# Altium PCB STC.PcbDoc
Units mil, origin at the board's own origin, x right, y up, seen from the top; angles counter-clockwise.
Board outline 6000 x 4000 mil, 2 copper layers (Top Layer, Bottom Layer); 22 components, 0 nets, 580 pads, 4 vias.
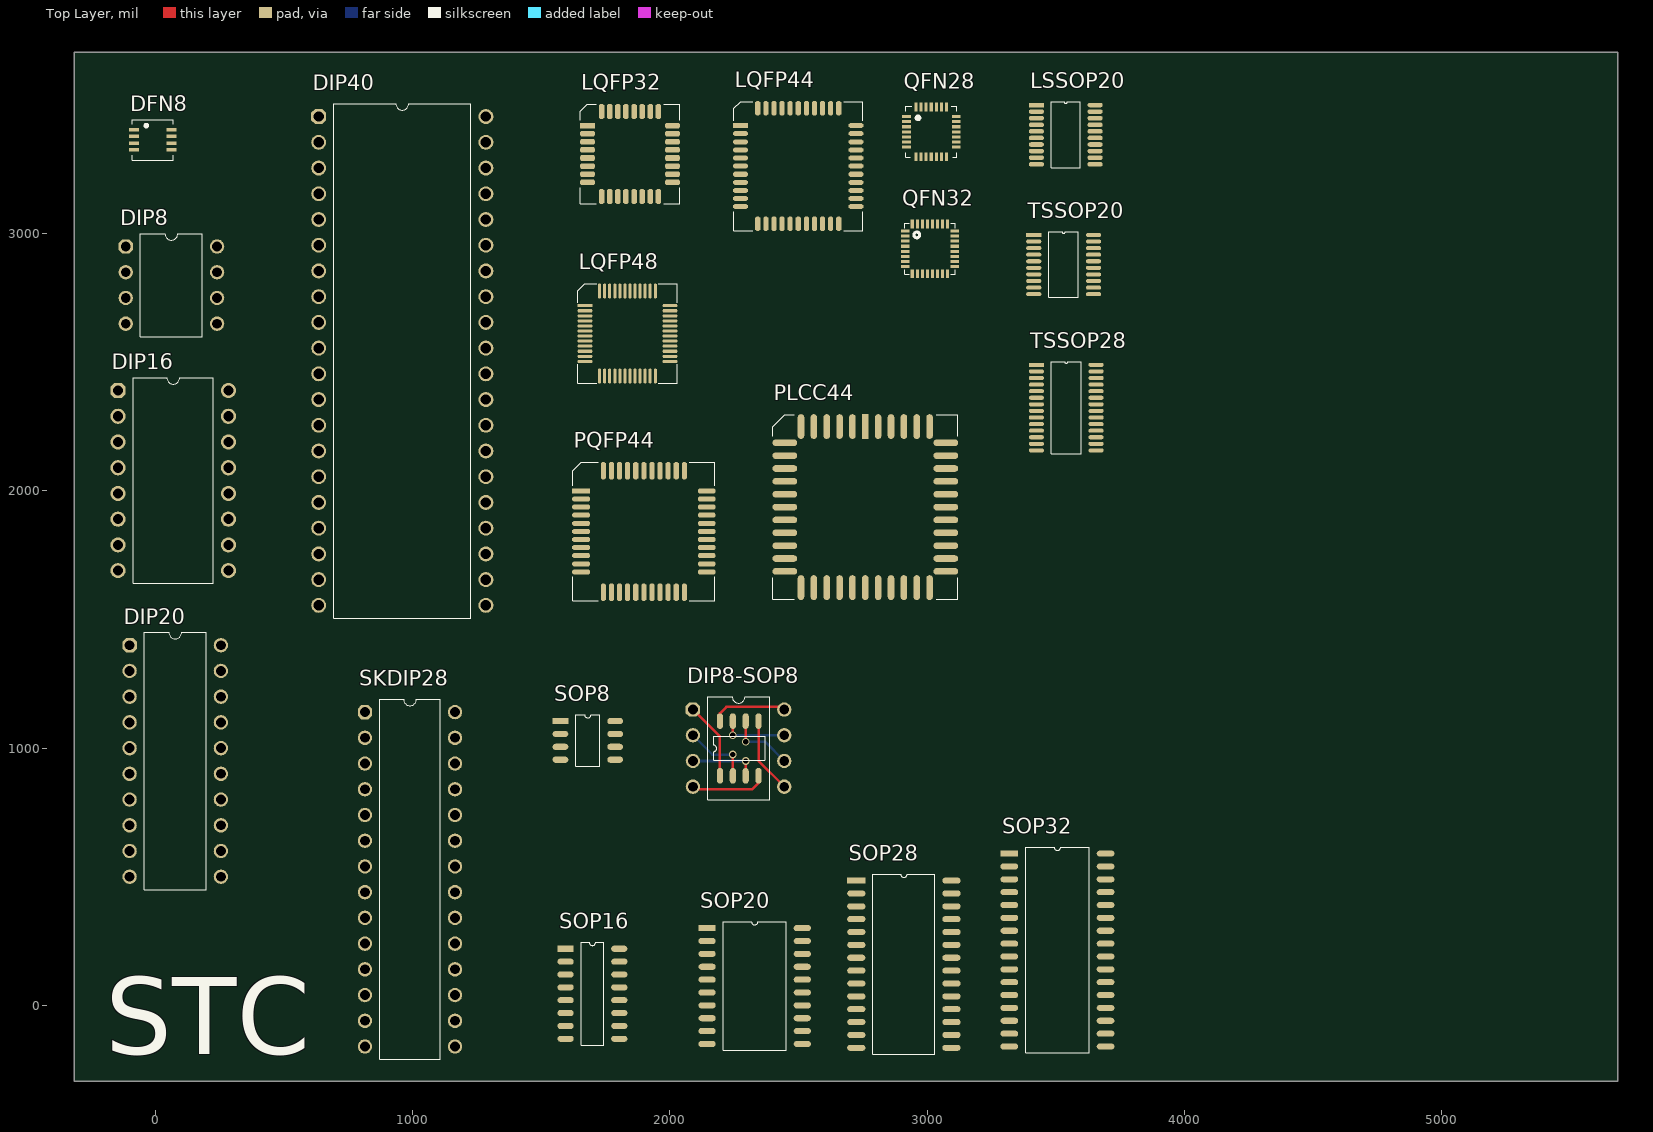
[diagram p0: Top Layer view]
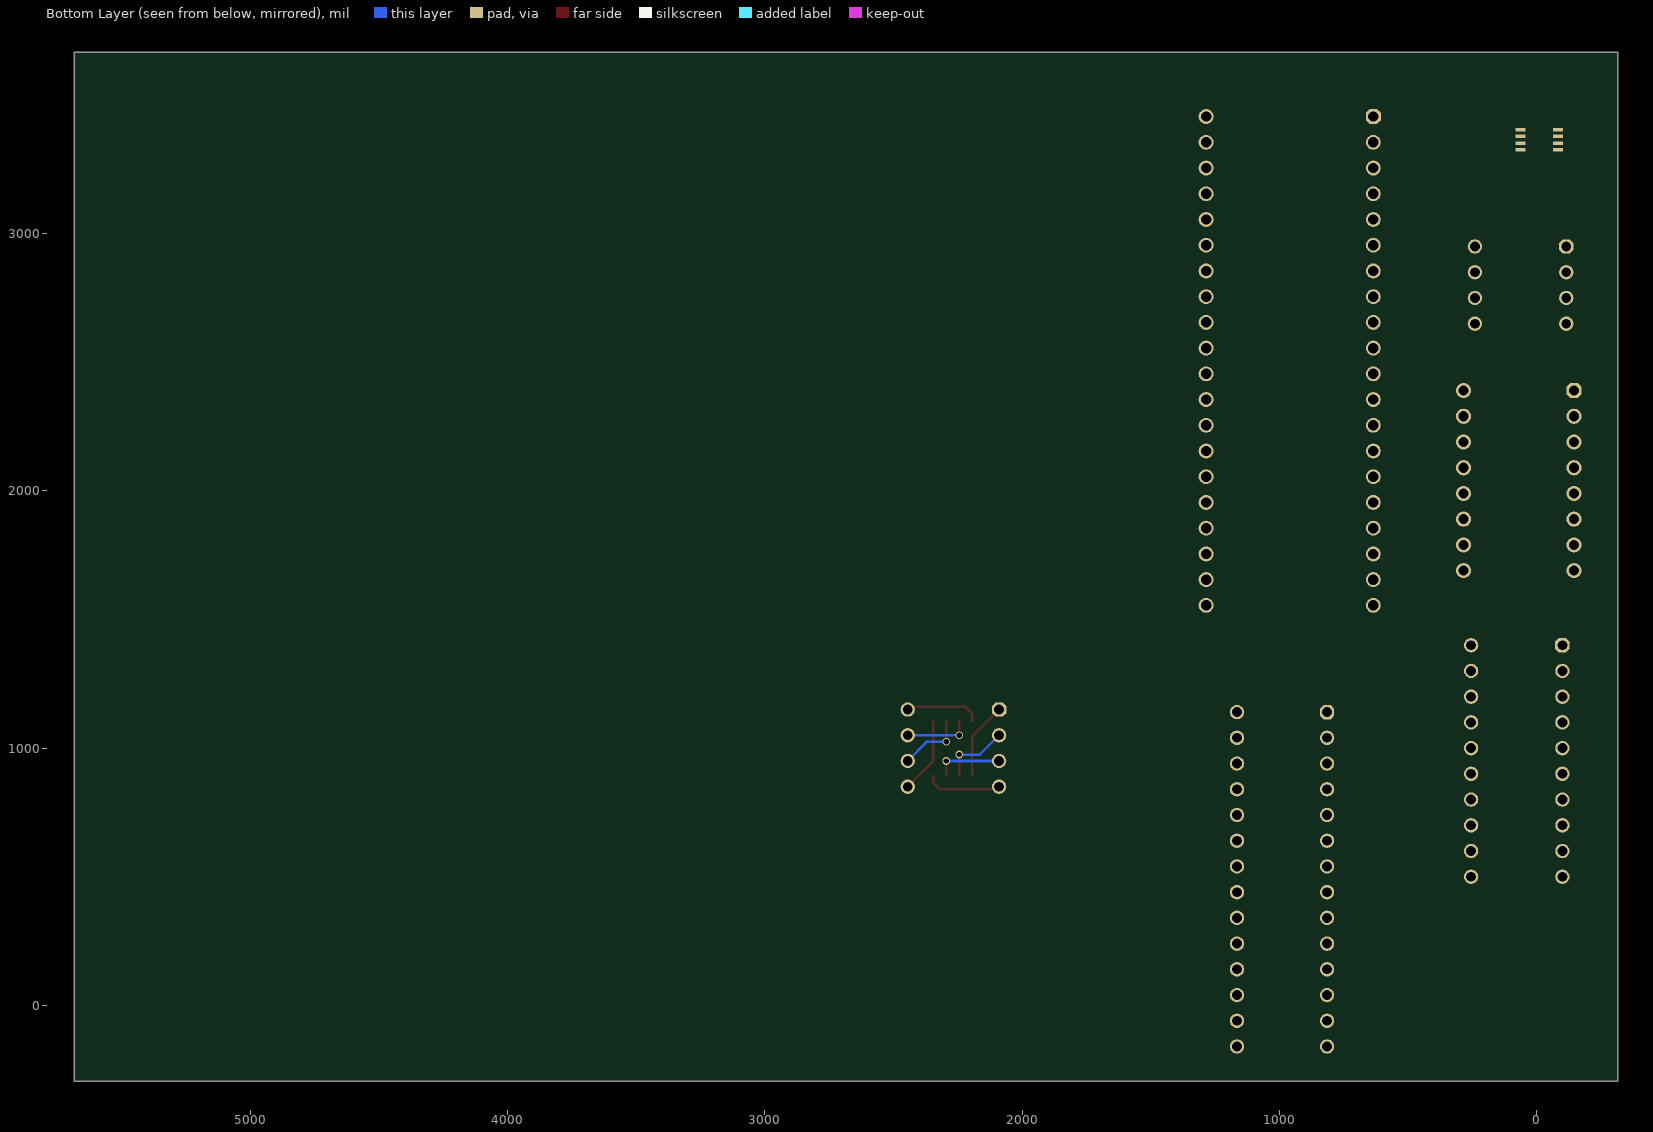
[diagram p1: Bottom Layer view, seen from below]

## Layer stack, top to bottom
Top Layer: signal copper 1.4
Dielectric: dielectric 12.6, FR-4, Dk 4.8
Bottom Layer: signal copper 1.4

## Board outline
-315,-295 -315,3705 5685,3705 5685,-295

## Design rules (kind name [scope] priority, off if disabled: settings)
Clearance [All] p1: gap=10
FabricationTestPointUsage TestPointUsage [All] p1: valid=0 allowmultiple=FALSE
FabricationTestpoint Testpoint [All] p1: side=3 testpointundercomponent=TRUE minsize=40 maxsize=100 preferedsize=60 minholesize=0 maxholesize=40 preferedholesize=32 testpointgrid=1 allowsidetop=TRUE allowsidebottom=TRUE usegrid=TRUE gridtolerance=0.01
PolygonConnect [All] p1: connectstyle=Relief reliefconductorwidth=10 reliefentries=4 polygonreliefangle="90 Angle"
RoutingVias [All] p1: holewidth=28 width=50 viastyle="Through Hole" minholewidth=28 minwidth=50 maxholewidth=28 maxwidth=50
SilkscreenOverComponentPads [All] p1: minsilkscreentomaskgap=10
SolderMaskExpansion [All] p1: expansion=4
Width [All] p1: maxlimit=10 minlimit=10 preferedwidth=10
25 further rules are at their usual default settings.

## Components (designator, comment, footprint, x,y, rotation, side; value= is the part's Value field where it differs from the comment)
DFN8 "Comment" DFN8 -10,3365 r0 top
DIP8 "Comment" DIP8 -115,2950 r0 top
DIP8-SOP8 "Comment" DIP8_SOP8 2090,1150 r0 top
DIP16 "Comment" DIP16 -145,2390 r0 top
DIP20 "Comment" DIP20 -100,1400 r0 top
DIP40 "Comment" DIP40 635,3455 r0 top
LQFP32 "Comment" LQFP32 1680,3420 r0 top
LQFP44 "Comment" LQFP44 2275,3420 r0 top
LQFP48 "Comment" LQFP48 1670,2720 r0 top
LSSOP20 "Comment" LSSOP20 3425,3500 r0 top
PLCC44 "Comment" PLCC44 2760,2250 r0 top
PQFP44 "Comment" PQFP44 1655,2000 r0 top
QFN28 "Comment" QFN28 2920,3455 r0 top
QFN32 "Comment" QFN32 2915,3010 r0 top
SKDIP28 "Comment" SKDIP28 815,1140 r0 top
SOP8 "Comment" SOP8 1575,1105 r0 top
SOP16 "Comment" SOP16 1595,220 r0 top
SOP20 "Comment" SOP20 2145,300 r0 top
SOP28 "Comment" SOP28 2725,485 r0 top
SOP32 "Comment" SOP32 3320,590 r0 top
TSSOP20 "Comment" TSSOP20 3415,2995 r0 top
TSSOP28 "Comment" TSSOP28 3425,2490 r0 top

## Footprints (in the part's own frame and the unit in brackets; to place one, negate y for a bottom-side part, rotate by r counter-clockwise, add the part's x,y. Pads: shape width x height; smd on the part's side, far side on the other; paste and mask are expansions set on the pad)
DFN8 [mm]
  rect 1x0.35 all layers, no hole: 1(-1.85,0.975) 2(-1.85,0.325) 3(-1.85,-0.325) 4(-1.85,-0.975) 5(1.85,-0.975) 6(1.85,-0.325) 7(1.85,0.325) 8(1.85,0.975)
  silkscreen extent -2,-2 2,2
DIP8 [mil]
  oct 56x56 hole 38: 1(0,0)
  round 56 hole 38: 2(0,-100) 3(0,-200) 4(0,-300) 5(355,-300) 6(355,-200) 7(355,-100) 8(355,0)
  silkscreen extent 57,-350 298,50
DIP8_SOP8 [mil]
  oct 56x56 hole 38: 1(0,0)
  oct 24x61 smd: 1(105,-257.6)
  round 56 hole 38: 2(0,-100) 3(0,-200) 4(0,-300) 5(355,-300) 6(355,-200) 7(355,-100) 8(355,0)
  oval 24x61 smd: 2(155,-257.6) 3(205,-257.6) 4(255,-257.6) 5(255,-45) 6(205,-45) 7(155,-45) 8(105,-45)
  Top Layer lines w10: 0,-300 10,-310 230,-310 255,-285 255,-257.6 ; 0,0 105,-105 105,-257.6 ; 105,-45 105,-15 130,10 345,10 355,0 ; 155,-257.6 155,-175 ; 155,-100 155,-45 ; 205,-257.6 205,-200 ; 205,-125 205,-45 ; 255,-45 255,-200 355,-300 ; 205,-45 205,-45
  Bottom Layer lines w10: 0,-200 205,-200 ; 0,-100 75,-175 155,-175 ; 155,-100 355,-100 ; 205,-125 280,-125 355,-200
  silkscreen extent 57,-350 298,50
DIP16 [mm]
  oct 1.5x1.5 hole 1: 1(0,0)
  round 1.5 hole 1: 2(0,-2.54) 3(0,-5.08) 4(0,-7.62) 5(0,-10.16) 6(0,-12.7) 7(0,-15.24) 8(0,-17.78) 9(10.9,-17.78) 10(10.9,-15.24) 11(10.9,-12.7) 12(10.9,-10.16) 13(10.9,-7.62) 14(10.9,-5.08) 15(10.9,-2.54) 16(10.9,0)
  silkscreen extent 1.48,-19.05 9.42,1.27
DIP20 [mil]
  oct 56x56 hole 38: 1(0,0)
  round 56 hole 38: 2(0,-100) 3(0,-200) 4(0,-300) 5(0,-400) 6(0,-500) 7(0,-600) 8(0,-700) 9(0,-800) 10(0,-900) 11(355,-900) 12(355,-800) 13(355,-700) 14(355,-600) 15(355,-500) 16(355,-400) 17(355,-300) 18(355,-200) 19(355,-100) 20(355,0)
  silkscreen extent 57,-950 298,50
DIP40 [mil]
  oct 58x58 hole 40: 1(0,0)
  round 58 hole 40: 2(0,-100) 3(0,-200) 4(0,-300) 5(0,-400) 6(0,-500) 7(0,-600) 8(0,-700) 9(0,-800) 10(0,-900) 11(0,-1000) 12(0,-1100) 13(0,-1200) 14(0,-1300) 15(0,-1400) 16(0,-1500) 17(0,-1600) 18(0,-1700) 19(0,-1800) 20(0,-1900) 21(650,-1900) 22(650,-1800) 23(650,-1700) 24(650,-1600) 25(650,-1500) 26(650,-1400) 27(650,-1300) 28(650,-1200) 29(650,-1100) 30(650,-1000) 31(650,-900) 32(650,-800) 33(650,-700) 34(650,-600) 35(650,-500) 36(650,-400) 37(650,-300) 38(650,-200) 39(650,-100) 40(650,0)
  silkscreen extent 58,-1950 592,50
LQFP32 [mm]
  rect 1.5x0.55 smd: 1(0,0)
  oct 1.5x0.55 smd: 2(0,-0.8) 3(0,-1.6) 4(0,-2.4) 5(0,-3.2) 6(0,-4) 7(0,-4.8) 8(0,-5.6) 17(8.4,-5.6) 18(8.4,-4.8) 19(8.4,-4) 20(8.4,-3.2) 21(8.4,-2.4) 22(8.4,-1.6) 23(8.4,-0.8) 24(8.4,0)
  oct 0.55x1.5 smd: 9(1.4,-7) 10(2.2,-7) 11(3,-7) 12(3.8,-7) 13(4.6,-7) 14(5.4,-7) 15(6.2,-7) 16(7,-7) 25(7,1.4) 26(6.2,1.4) 27(5.4,1.4) 28(4.6,1.4) 29(3.8,1.4) 30(3,1.4) 31(2.2,1.4) 32(1.4,1.4)
  silkscreen extent -0.7,-7.7 9.1,2.1
LQFP44 [mm]
  rect 1.45x0.5 smd: 1(0,0)
  oct 1.45x0.5 smd: 2(0,-0.8) 3(0,-1.6) 4(0,-2.4) 5(0,-3.2) 6(0,-4) 7(0,-4.8) 8(0,-5.6) 9(0,-6.4) 10(0,-7.2) 11(0,-8) 23(11.4,-8) 24(11.4,-7.2) 25(11.4,-6.4) 26(11.4,-5.6) 27(11.4,-4.8) 28(11.4,-4) 29(11.4,-3.2) 30(11.4,-2.4) 31(11.4,-1.6) 32(11.4,-0.8) 33(11.4,0)
  oct 0.5x1.45 smd: 12(1.7,-9.7) 13(2.5,-9.7) 14(3.3,-9.7) 15(4.1,-9.7) 16(4.9,-9.7) 17(5.7,-9.7) 18(6.5,-9.7) 19(7.3,-9.7) 20(8.1,-9.7) 21(8.9,-9.7) 22(9.7,-9.7) 34(9.7,1.7) 35(8.9,1.7) 36(8.1,1.7) 37(7.3,1.7) 38(6.5,1.7) 39(5.7,1.7) 40(4.9,1.7) 41(4.1,1.7) 42(3.3,1.7) 43(2.5,1.7) 44(1.7,1.7)
  silkscreen extent -0.67,-10.38 12.08,2.37
LQFP48 [mm]
  rect 1.5x0.3 smd: 1(0,0)
  oct 1.5x0.3 smd: 2(0,-0.5) 3(0,-1) 4(0,-1.5) 5(0,-2) 6(0,-2.5) 7(0,-3) 8(0,-3.5) 9(0,-4) 10(0,-4.5) 11(0,-5) 12(0,-5.5) 25(8.4,-5.5) 26(8.4,-5) 27(8.4,-4.5) 28(8.4,-4) 29(8.4,-3.5) 30(8.4,-3) 31(8.4,-2.5) 32(8.4,-2) 33(8.4,-1.5) 34(8.4,-1) 35(8.4,-0.5) 36(8.4,0)
  oct 0.3x1.5 smd: 13(1.45,-6.95) 14(1.95,-6.95) 15(2.45,-6.95) 16(2.95,-6.95) 17(3.45,-6.95) 18(3.95,-6.95) 19(4.45,-6.95) 20(4.95,-6.95) 21(5.45,-6.95) 22(5.95,-6.95) 23(6.45,-6.95) 24(6.95,-6.95) 37(6.95,1.45) 38(6.45,1.45) 39(5.95,1.45) 40(5.45,1.45) 41(4.95,1.45) 42(4.45,1.45) 43(3.95,1.45) 44(3.45,1.45) 45(2.95,1.45) 46(2.45,1.45) 47(1.95,1.45) 48(1.45,1.45)
  silkscreen extent -0.7,-7.65 9.1,2.15
LSSOP20 [mm]
  rect 1.5x0.45 smd: 1(0,0)
  oval 1.5x0.45 smd: 2(0,-0.65) 3(0,-1.3) 4(0,-1.95) 5(0,-2.6) 6(0,-3.25) 7(0,-3.9) 8(0,-4.55) 9(0,-5.2) 10(0,-5.85) 11(5.8,-5.85) 12(5.8,-5.2) 13(5.8,-4.55) 14(5.8,-3.9) 15(5.8,-3.25) 16(5.8,-2.6) 17(5.8,-1.95) 18(5.8,-1.3) 19(5.8,-0.65) 20(5.8,0)
  silkscreen extent 1.48,-6.18 4.32,0.33
PLCC44 [mm]
  rect 0.65x2.45 smd: 1(0,0)
  oval 0.65x2.45 smd: 2(-1.27,0) 3(-2.54,0) 4(-3.81,0) 5(-5.08,0) 6(-6.35,0) 18(-6.35,-15.9) 19(-5.08,-15.9) 20(-3.81,-15.9) 21(-2.54,-15.9) 22(-1.27,-15.9) 23(0,-15.9) 24(1.27,-15.9) 25(2.54,-15.9) 26(3.81,-15.9) 27(5.08,-15.9) 28(6.35,-15.9) 40(6.35,0) 41(5.08,0) 42(3.81,0) 43(2.54,0) 44(1.27,0)
  oval 2.45x0.65 smd: 7(-7.95,-1.6) 8(-7.95,-2.87) 9(-7.95,-4.14) 10(-7.95,-5.41) 11(-7.95,-6.68) 12(-7.95,-7.95) 13(-7.95,-9.22) 14(-7.95,-10.49) 15(-7.95,-11.76) 16(-7.95,-13.03) 17(-7.95,-14.3) 29(7.95,-14.3) 30(7.95,-13.03) 31(7.95,-11.76) 32(7.95,-10.49) 33(7.95,-9.22) 34(7.95,-7.95) 35(7.95,-6.68) 36(7.95,-5.41) 37(7.95,-4.14) 38(7.95,-2.87) 39(7.95,-1.6)
  silkscreen extent -9.12,-17.07 9.12,1.17
PQFP44 [mm]
  rect 1.75x0.5 smd: 1(0,0)
  oct 1.75x0.5 smd: 2(0,-0.8) 3(0,-1.6) 4(0,-2.4) 5(0,-3.2) 6(0,-4) 7(0,-4.8) 8(0,-5.6) 9(0,-6.4) 10(0,-7.2) 11(0,-8) 23(12.4,-8) 24(12.4,-7.2) 25(12.4,-6.4) 26(12.4,-5.6) 27(12.4,-4.8) 28(12.4,-4) 29(12.4,-3.2) 30(12.4,-2.4) 31(12.4,-1.6) 32(12.4,-0.8) 33(12.4,0)
  oct 0.5x1.75 smd: 12(2.2,-10) 13(3,-10) 14(3.8,-10) 15(4.6,-10) 16(5.4,-10) 17(6.2,-10) 18(7,-10) 19(7.8,-10) 20(8.6,-10) 21(9.4,-10) 22(10.2,-10) 34(10.2,2) 35(9.4,2) 36(8.6,2) 37(7.8,2) 38(7,2) 39(6.2,2) 40(5.4,2) 41(4.6,2) 42(3.8,2) 43(3,2) 44(2.2,2)
  silkscreen extent -0.82,-10.83 13.23,2.83
QFN28 [mm]
  rect 0.85x0.3 smd: 1(0,0) 2(0,-0.5) 3(0,-1) 4(0,-1.5) 5(0,-2) 6(0,-2.5) 7(0,-3) 15(4.9,-3) 16(4.9,-2.5) 17(4.9,-2) 18(4.9,-1.5) 19(4.9,-1) 20(4.9,-0.5) 21(4.9,0)
  rect 0.3x0.85 smd: 8(0.95,-3.95) 9(1.45,-3.95) 10(1.95,-3.95) 11(2.45,-3.95) 12(2.95,-3.95) 13(3.45,-3.95) 14(3.95,-3.95) 22(3.95,0.95) 23(3.45,0.95) 24(2.95,0.95) 25(2.45,0.95) 26(1.95,0.95) 27(1.45,0.95) 28(0.95,0.95)
  silkscreen extent -0.05,-4 4.95,1
QFN32 [mm]
  rect 0.85x0.3 smd: 1(0,0) 2(0,-0.5) 3(0,-1) 4(0,-1.5) 5(0,-2) 6(0,-2.5) 7(0,-3) 8(0,-3.5) 17(4.9,-3.5) 18(4.9,-3) 19(4.9,-2.5) 20(4.9,-2) 21(4.9,-1.5) 22(4.9,-1) 23(4.9,-0.5) 24(4.9,0)
  rect 0.3x0.85 smd: 9(0.7,-4.2) 10(1.2,-4.2) 11(1.7,-4.2) 12(2.2,-4.2) 13(2.7,-4.2) 14(3.2,-4.2) 15(3.7,-4.2) 16(4.2,-4.2) 25(4.2,0.7) 26(3.7,0.7) 27(3.2,0.7) 28(2.7,0.7) 29(2.2,0.7) 30(1.7,0.7) 31(1.2,0.7) 32(0.7,0.7)
  silkscreen extent -0.05,-4.25 4.95,0.75
SKDIP28 [mil]
  oct 56x56 hole 38: 1(0,0)
  round 56 hole 38: 2(0,-100) 3(0,-200) 4(0,-300) 5(0,-400) 6(0,-500) 7(0,-600) 8(0,-700) 9(0,-800) 10(0,-900) 11(0,-1000) 12(0,-1100) 13(0,-1200) 14(0,-1300) 15(350,-1300) 16(350,-1200) 17(350,-1100) 18(350,-1000) 19(350,-900) 20(350,-800) 21(350,-700) 22(350,-600) 23(350,-500) 24(350,-400) 25(350,-300) 26(350,-200) 27(350,-100) 28(350,0)
  silkscreen extent 57,-1350 293,50
SOP8 [mil]
  rect 61x24 smd: 1(0,0)
  oval 61x24 smd: 2(0,-50) 3(0,-100) 4(0,-150) 5(212.6,-150) 6(212.6,-100) 7(212.6,-50) 8(212.6,0)
  silkscreen extent 60,-175 153,25
SOP16 [mm]
  rect 1.6x0.6 smd: 1(0,0)
  oval 1.6x0.6 smd: 2(0,-1.27) 3(0,-2.54) 4(0,-3.81) 5(0,-5.08) 6(0,-6.35) 7(0,-7.62) 8(0,-8.89) 9(5.3,-8.89) 10(5.3,-7.62) 11(5.3,-6.35) 12(5.3,-5.08) 13(5.3,-3.81) 14(5.3,-2.54) 15(5.3,-1.27) 16(5.3,0)
  silkscreen extent 1.53,-9.53 3.77,0.64
SOP20 [mm]
  rect 1.7x0.6 smd: 1(0,0)
  oval 1.7x0.6 smd: 2(0,-1.27) 3(0,-2.54) 4(0,-3.81) 5(0,-5.08) 6(0,-6.35) 7(0,-7.62) 8(0,-8.89) 9(0,-10.16) 10(0,-11.43) 11(9.4,-11.43) 12(9.4,-10.16) 13(9.4,-8.89) 14(9.4,-7.62) 15(9.4,-6.35) 16(9.4,-5.08) 17(9.4,-3.81) 18(9.4,-2.54) 19(9.4,-1.27) 20(9.4,0)
  silkscreen extent 1.58,-12.06 7.82,0.64
SOP28 [mm]
  rect 1.8x0.6 smd: 1(0,0)
  oval 1.8x0.6 smd: 2(0,-1.27) 3(0,-2.54) 4(0,-3.81) 5(0,-5.08) 6(0,-6.35) 7(0,-7.62) 8(0,-8.89) 9(0,-10.16) 10(0,-11.43) 11(0,-12.7) 12(0,-13.97) 13(0,-15.24) 14(0,-16.51) 15(9.4,-16.51) 16(9.4,-15.24) 17(9.4,-13.97) 18(9.4,-12.7) 19(9.4,-11.43) 20(9.4,-10.16) 21(9.4,-8.89) 22(9.4,-7.62) 23(9.4,-6.35) 24(9.4,-5.08) 25(9.4,-3.81) 26(9.4,-2.54) 27(9.4,-1.27) 28(9.4,0)
  silkscreen extent 1.63,-17.14 7.77,0.64
SOP32 [mm]
  rect 1.75x0.6 smd: 1(0,0)
  oval 1.75x0.6 smd: 2(0,-1.27) 3(0,-2.54) 4(0,-3.81) 5(0,-5.08) 6(0,-6.35) 7(0,-7.62) 8(0,-8.89) 9(0,-10.16) 10(0,-11.43) 11(0,-12.7) 12(0,-13.97) 13(0,-15.24) 14(0,-16.51) 15(0,-17.78) 16(0,-19.05) 17(9.5,-19.05) 18(9.5,-17.78) 19(9.5,-16.51) 20(9.5,-15.24) 21(9.5,-13.97) 22(9.5,-12.7) 23(9.5,-11.43) 24(9.5,-10.16) 25(9.5,-8.89) 26(9.5,-7.62) 27(9.5,-6.35) 28(9.5,-5.08) 29(9.5,-3.81) 30(9.5,-2.54) 31(9.5,-1.27) 32(9.5,0)
  silkscreen extent 1.61,-19.68 7.89,0.64
TSSOP20 [mm]
  rect 1.5x0.4 smd: 1(0,0)
  oval 1.5x0.4 smd: 2(0,-0.65) 3(0,-1.3) 4(0,-1.95) 5(0,-2.6) 6(0,-3.25) 7(0,-3.9) 8(0,-4.55) 9(0,-5.2) 10(0,-5.85) 11(5.9,-5.85) 12(5.9,-5.2) 13(5.9,-4.55) 14(5.9,-3.9) 15(5.9,-3.25) 16(5.9,-2.6) 17(5.9,-1.95) 18(5.9,-1.3) 19(5.9,-0.65) 20(5.9,0)
  silkscreen extent 1.48,-6.18 4.42,0.33
TSSOP28 [mm]
  rect 1.5x0.4 smd: 1(0,0)
  oval 1.5x0.4 smd: 2(0,-0.65) 3(0,-1.3) 4(0,-1.95) 5(0,-2.6) 6(0,-3.25) 7(0,-3.9) 8(0,-4.55) 9(0,-5.2) 10(0,-5.85) 11(0,-6.5) 12(0,-7.15) 13(0,-7.8) 14(0,-8.45) 15(5.9,-8.45) 16(5.9,-7.8) 17(5.9,-7.15) 18(5.9,-6.5) 19(5.9,-5.85) 20(5.9,-5.2) 21(5.9,-4.55) 22(5.9,-3.9) 23(5.9,-3.25) 24(5.9,-2.6) 25(5.9,-1.95) 26(5.9,-1.3) 27(5.9,-0.65) 28(5.9,0)
  silkscreen extent 1.48,-8.78 4.42,0.33

## Via types
v1: diameter 30, hole 20, Top Layer to Bottom Layer, 4 vias

## Nets (pads, with @x,y where several pads share a name; then routed paths per layer and width w, separated by ;. In a path a pad name is that pad's centre, name@x,y a point inside that pad or via, vN(x,y) a via of type N, cw(c..) or ccw(c..) an arc to the next point about the centre after c; other vN are vias at no path point)
pads on no net: DFN8.1 DFN8.2 DFN8.3 DFN8.4 DFN8.5 DFN8.6 DFN8.7 DFN8.8 DIP8-SOP8.1 DIP8-SOP8.2 DIP8-SOP8.3 DIP8-SOP8.4 DIP8-SOP8.5 DIP8-SOP8.6 DIP8-SOP8.7 DIP8-SOP8.8 DIP8.1 DIP8.2 DIP8.3 DIP8.4 DIP8.5 DIP8.6 DIP8.7 DIP8.8 DIP16.1 DIP16.2 DIP16.3 DIP16.4 DIP16.5 DIP16.6 DIP16.7 DIP16.8 DIP16.9 DIP16.10 DIP16.11 DIP16.12 DIP16.13 DIP16.14 DIP16.15 DIP16.16 DIP20.1 DIP20.2 DIP20.3 DIP20.4 DIP20.5 DIP20.6 DIP20.7 DIP20.8 DIP20.9 DIP20.10 DIP20.11 DIP20.12 DIP20.13 DIP20.14 DIP20.15 DIP20.16 DIP20.17 DIP20.18 DIP20.19 DIP20.20 DIP40.1 DIP40.2 DIP40.3 DIP40.4 DIP40.5 DIP40.6 DIP40.7 DIP40.8 DIP40.9 DIP40.10 DIP40.11 DIP40.12 DIP40.13 DIP40.14 DIP40.15 DIP40.16 DIP40.17 DIP40.18 DIP40.19 DIP40.20 DIP40.21 DIP40.22 DIP40.23 DIP40.24 DIP40.25 DIP40.26 DIP40.27 DIP40.28 DIP40.29 DIP40.30 DIP40.31 DIP40.32 DIP40.33 DIP40.34 DIP40.35 DIP40.36 DIP40.37 DIP40.38 DIP40.39 DIP40.40 LQFP32.1 LQFP32.2 LQFP32.3 LQFP32.4 LQFP32.5 LQFP32.6 LQFP32.7 LQFP32.8 LQFP32.9 LQFP32.10 LQFP32.11 LQFP32.12 LQFP32.13 LQFP32.14 LQFP32.15 LQFP32.16 LQFP32.17 LQFP32.18 LQFP32.19 LQFP32.20 LQFP32.21 LQFP32.22 LQFP32.23 LQFP32.24 LQFP32.25 LQFP32.26 LQFP32.27 LQFP32.28 LQFP32.29 LQFP32.30 LQFP32.31 LQFP32.32 LQFP44.1 LQFP44.2 LQFP44.3 LQFP44.4 LQFP44.5 LQFP44.6 LQFP44.7 LQFP44.8 LQFP44.9 LQFP44.10 LQFP44.11 LQFP44.12 LQFP44.13 LQFP44.14 LQFP44.15 LQFP44.16 LQFP44.17 LQFP44.18 LQFP44.19 LQFP44.20 LQFP44.21 LQFP44.22 LQFP44.23 LQFP44.24 LQFP44.25 LQFP44.26 LQFP44.27 LQFP44.28 LQFP44.29 LQFP44.30 LQFP44.31 LQFP44.32 LQFP44.33 LQFP44.34 LQFP44.35 LQFP44.36 LQFP44.37 LQFP44.38 LQFP44.39 LQFP44.40 LQFP44.41 LQFP44.42 LQFP44.43 LQFP44.44 LQFP48.1 LQFP48.2 LQFP48.3 LQFP48.4 LQFP48.5 LQFP48.6 LQFP48.7 LQFP48.8 LQFP48.9 LQFP48.10 LQFP48.11 LQFP48.12 LQFP48.13 LQFP48.14 LQFP48.15 LQFP48.16 LQFP48.17 LQFP48.18 LQFP48.19 LQFP48.20 LQFP48.21 LQFP48.22 LQFP48.23 LQFP48.24 LQFP48.25 LQFP48.26 LQFP48.27 LQFP48.28 LQFP48.29 LQFP48.30 LQFP48.31 LQFP48.32 LQFP48.33 LQFP48.34 LQFP48.35 LQFP48.36 LQFP48.37 LQFP48.38 LQFP48.39 LQFP48.40 LQFP48.41 LQFP48.42 LQFP48.43 LQFP48.44 LQFP48.45 LQFP48.46 LQFP48.47 LQFP48.48 LSSOP20.1 LSSOP20.2 LSSOP20.3 LSSOP20.4 LSSOP20.5 LSSOP20.6 LSSOP20.7 LSSOP20.8 LSSOP20.9 LSSOP20.10 LSSOP20.11 LSSOP20.12 LSSOP20.13 LSSOP20.14 LSSOP20.15 LSSOP20.16 LSSOP20.17 LSSOP20.18 LSSOP20.19 LSSOP20.20 PLCC44.1 PLCC44.2 PLCC44.3 PLCC44.4 PLCC44.5 PLCC44.6 PLCC44.7 PLCC44.8 PLCC44.9 PLCC44.10 PLCC44.11 PLCC44.12 PLCC44.13 PLCC44.14 PLCC44.15 PLCC44.16 PLCC44.17 PLCC44.18 PLCC44.19 PLCC44.20 PLCC44.21 PLCC44.22 PLCC44.23 PLCC44.24 PLCC44.25 PLCC44.26 PLCC44.27 PLCC44.28 PLCC44.29 PLCC44.30 PLCC44.31 PLCC44.32 PLCC44.33 PLCC44.34 PLCC44.35 PLCC44.36 PLCC44.37 PLCC44.38 PLCC44.39 PLCC44.40 PLCC44.41 PLCC44.42 PLCC44.43 PLCC44.44 PQFP44.1 PQFP44.2 PQFP44.3 PQFP44.4 PQFP44.5 PQFP44.6 PQFP44.7 PQFP44.8 PQFP44.9 PQFP44.10 PQFP44.11 PQFP44.12 PQFP44.13 PQFP44.14 PQFP44.15 PQFP44.16 PQFP44.17 PQFP44.18 PQFP44.19 PQFP44.20 PQFP44.21 PQFP44.22 PQFP44.23 PQFP44.24 PQFP44.25 PQFP44.26 PQFP44.27 PQFP44.28 PQFP44.29 PQFP44.30 PQFP44.31 PQFP44.32 PQFP44.33 PQFP44.34 PQFP44.35 PQFP44.36 PQFP44.37 PQFP44.38 PQFP44.39 PQFP44.40 PQFP44.41 PQFP44.42 PQFP44.43 PQFP44.44 QFN28.1 QFN28.2 QFN28.3 QFN28.4 QFN28.5 QFN28.6 QFN28.7 QFN28.8 QFN28.9 QFN28.10 QFN28.11 QFN28.12 QFN28.13 QFN28.14 QFN28.15 QFN28.16 QFN28.17 QFN28.18 QFN28.19 QFN28.20 QFN28.21 QFN28.22 QFN28.23 QFN28.24 QFN28.25 QFN28.26 QFN28.27 QFN28.28 QFN32.1 QFN32.2 QFN32.3 QFN32.4 QFN32.5 QFN32.6 QFN32.7 QFN32.8 QFN32.9 QFN32.10 QFN32.11 QFN32.12 QFN32.13 QFN32.14 QFN32.15 QFN32.16 QFN32.17 QFN32.18 QFN32.19 QFN32.20 QFN32.21 QFN32.22 QFN32.23 QFN32.24 QFN32.25 QFN32.26 QFN32.27 QFN32.28 QFN32.29 QFN32.30 QFN32.31 QFN32.32 SKDIP28.1 SKDIP28.2 SKDIP28.3 SKDIP28.4 SKDIP28.5 SKDIP28.6 SKDIP28.7 SKDIP28.8 SKDIP28.9 SKDIP28.10 SKDIP28.11 SKDIP28.12 SKDIP28.13 SKDIP28.14 SKDIP28.15 SKDIP28.16 SKDIP28.17 SKDIP28.18 SKDIP28.19 SKDIP28.20 SKDIP28.21 SKDIP28.22 SKDIP28.23 SKDIP28.24 SKDIP28.25 SKDIP28.26 SKDIP28.27 SKDIP28.28 SOP8.1 SOP8.2 SOP8.3 SOP8.4 SOP8.5 SOP8.6 SOP8.7 SOP8.8 SOP16.1 SOP16.2 SOP16.3 SOP16.4 SOP16.5 SOP16.6 SOP16.7 SOP16.8 SOP16.9 SOP16.10 SOP16.11 SOP16.12 SOP16.13 SOP16.14 SOP16.15 SOP16.16 SOP20.1 SOP20.2 SOP20.3 SOP20.4 SOP20.5 SOP20.6 SOP20.7 SOP20.8 SOP20.9 SOP20.10 SOP20.11 SOP20.12 SOP20.13 SOP20.14 SOP20.15 SOP20.16 SOP20.17 SOP20.18 SOP20.19 SOP20.20 SOP28.1 SOP28.2 SOP28.3 SOP28.4 SOP28.5 SOP28.6 SOP28.7 SOP28.8 SOP28.9 SOP28.10 SOP28.11 SOP28.12 SOP28.13 SOP28.14 SOP28.15 SOP28.16 SOP28.17 SOP28.18 SOP28.19 SOP28.20 SOP28.21 SOP28.22 SOP28.23 SOP28.24 SOP28.25 SOP28.26 SOP28.27 SOP28.28 SOP32.1 SOP32.2 SOP32.3 SOP32.4 SOP32.5 SOP32.6 SOP32.7 SOP32.8 SOP32.9 SOP32.10 SOP32.11 SOP32.12 SOP32.13 SOP32.14 SOP32.15 SOP32.16 SOP32.17 SOP32.18 SOP32.19 SOP32.20 SOP32.21 SOP32.22 SOP32.23 SOP32.24 SOP32.25 SOP32.26 SOP32.27 SOP32.28 SOP32.29 SOP32.30 SOP32.31 SOP32.32 TSSOP20.1 TSSOP20.2 TSSOP20.3 TSSOP20.4 TSSOP20.5 TSSOP20.6 TSSOP20.7 TSSOP20.8 TSSOP20.9 TSSOP20.10 TSSOP20.11 TSSOP20.12 TSSOP20.13 TSSOP20.14 TSSOP20.15 TSSOP20.16 TSSOP20.17 TSSOP20.18 TSSOP20.19 TSSOP20.20 TSSOP28.1 TSSOP28.2 TSSOP28.3 TSSOP28.4 TSSOP28.5 TSSOP28.6 TSSOP28.7 TSSOP28.8 TSSOP28.9 TSSOP28.10 TSSOP28.11 TSSOP28.12 TSSOP28.13 TSSOP28.14 TSSOP28.15 TSSOP28.16 TSSOP28.17 TSSOP28.18 TSSOP28.19 TSSOP28.20 TSSOP28.21 TSSOP28.22 TSSOP28.23 TSSOP28.24 TSSOP28.25 TSSOP28.26 TSSOP28.27 TSSOP28.28
copper on no net:
  other v1: 2295,950 2245,975 2295,1025 2245,1050

## Silkscreen, mask and mechanical layers (free items; w line width, h text height)
Top Overlay:
  text "STC" at -195,-190 h300
Mechanical 16:
  drawing of 1874 lines, arcs and shapes, not listed
  text "1" at -1468,5040 h70
  text "2" at 1392,5040 h70
  text "3" at 4272,5040 h70
  text "4" at 7142,5040 h70
  text "A" at -2820,4134 h70
  text "A" at 8480,4134 h70
  text "B" at -2820,2242 h70
  text "B" at 8480,2242 h70
  text "C" at -2820,332 h70
  text "C" at 8480,332 h70
  text "ENGINEER:" at 3955,-1125 h45
  text "TITLE:" at 5455,-1125 h45
  text "PCB DESIGNER:" at 3955,-1420 h45
  text "D" at -2820,-1558 h70
  text "D" at 8480,-1558 h70
  text "DATE:" at 3955,-1725 h45
  text "PART NO.:" at 5455,-1725 h45
  text "REV:" at 7555,-1725 h45
  text "Altium Limited" at 2655,-1825 h70
  text ".PRINT_DATE" at 4005,-1845 h70
  text "12a Rodborough Rd" at 2655,-1925 h70
  text "Frenchs Forest" at 2655,-2025 h70
  text "FILE NAME:" at 3955,-2025 h45
  text "DWG NO:" at 5455,-2025 h45
  text "SCALE:" at 7555,-2025 h45
  text "NSW 2086" at 2655,-2125 h70
  text ".PCB_FILE_NAME_NO_PATH" at 4005,-2145 h70
  text "1" at -1468,-2360 h70
  text "2" at 1392,-2360 h70
  text "3" at 4272,-2360 h70
  text "4" at 7142,-2360 h70